# Altium PCB pcb.PcbDoc (part 2 of 2)
Units mil, origin at the board's own origin, x right, y up, seen from the top; angles counter-clockwise.
Board outline 3184 x 2328 mil, 2 copper layers (Top Layer, Bottom Layer); 76 components, 127 nets, 396 pads, 292 vias.
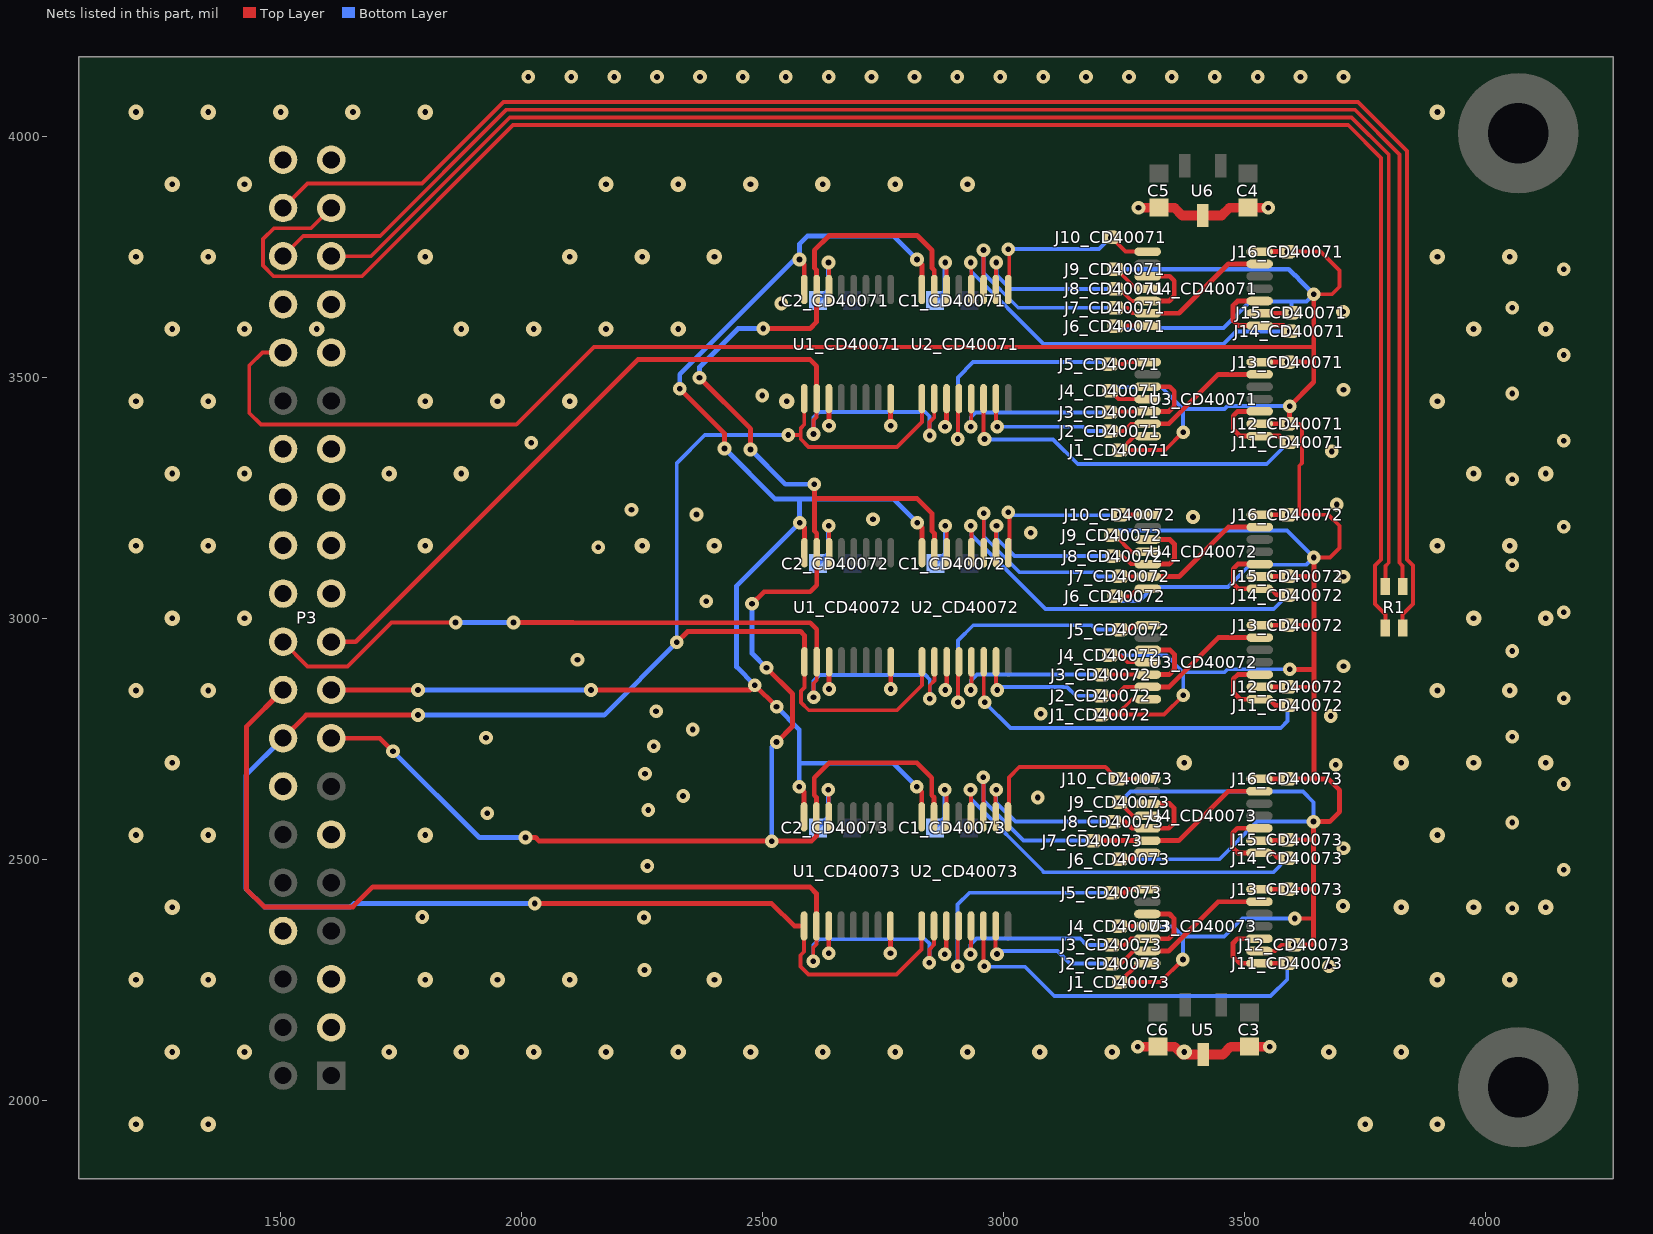
[diagram p2: the nets of this part, all layers, seen from the top]

## Via types
v1: diameter 28.35, hole 11.81, Top Layer to Bottom Layer, tented both sides, 177 vias
v2: diameter 32, hole 11.81, Top Layer to Bottom Layer, tented both sides, 115 vias

## Nets (pads, with @x,y where several pads share a name; then routed paths per layer and width w, separated by ;. In a path a pad name is that pad's centre, name@x,y a point inside that pad or via, vN(x,y) a via of type N, cw(c..) or ccw(c..) an arc to the next point about the centre after c; other vN are vias at no path point) (continued)
"CURRENT RTN": C1_CD40071.2 C1_CD40072.2 C1_CD40073.2 C2_CD40071.2 C2_CD40072.2 C2_CD40073.2 C3.2 C4.2 C5.2 C6.2 P3.3 P3.8 P3.11 P3.14 P3.28 P3.31 P3.33 P3.34 P3.39 P3.40 U1_CD40071.3 U1_CD40071.8 U1_CD40071.14 U1_CD40072.3 U1_CD40072.8 U1_CD40072.14 U1_CD40073.3 U1_CD40073.8 U1_CD40073.14 U2_CD40071.3 U2_CD40071.14 U2_CD40072.3 U2_CD40072.14 U2_CD40073.3 U2_CD40073.14 U5.3 U6.3 | length 1951.4
  Top Layer w8: U1_CD40073.14@2637.17,2587.87 v1@2637.17,2644.06 ; U1_CD40071.14@2637.61,3681.87 v1@2637.61,3738.06 ; U1_CD40072.14@2637.93,3135.87 v1@2637.93,3192.06 ; U2_CD40073.14@2881.17,2587.87 v1@2881.17,2644.06 ; U2_CD40071.14@2881.61,3681.87 v1@2881.61,3738.06 ; U2_CD40072.14@2881.93,3135.87 v1@2881.93,3192.06
  Top Layer w10: v1(2637.17,2305.13) U1_CD40073.3@2637.17,2361.5 ; v1(2637.61,3399.13) U1_CD40071.3@2637.61,3455.5 ; v1(2637.93,2853.13) U1_CD40072.3@2637.93,2909.5 ; v1(2765.13,2305.13) U1_CD40073.8@2765.13,2361.5 ; v1(2765.57,3399.13) U1_CD40071.8@2765.57,3455.5 ; v1(2765.88,2853.13) U1_CD40072.8@2765.88,2909.5 ; v1(2878,2303) 2881.17,2306.17 U2_CD40073.3@2881.17,2361.5 ; v1(2878.44,3397) 2881.61,3400.17 U2_CD40071.3@2881.61,3455.5 ; v1(2878.76,2851) 2881.93,2854.17 U2_CD40072.3@2881.93,2909.5
  Top Layer w20: v1(3278,2111.01) C6.2@3320,2111.01 3354.99,2111.01 3371.13,2094.87 U5.3@3414,2094.87 3454.87,2094.87 3471.01,2111.01 C3.2@3510,2111.01 v1(3552,2111.01) ; v1(3280,3851.57) C5.2@3322,3851.57 3354.43,3851.57 3370.57,3835.43 U6.3@3413,3835.43 3452.43,3835.43 3468.57,3851.57 C4.2@3507,3851.57 v1(3549,3851.57)
  Bottom Layer w10: C2_CD40073.2@2614.57,2565 2636.17,2586.61 v1(2636.17,2644.06) ; C2_CD40071.2@2615.01,3659 2636.61,3680.61 v1(2636.61,3738.06) ; C2_CD40072.2@2615.32,3113 2636.93,3134.61 v1(2636.93,3192.06) ; C1_CD40073.2@2857.57,2565 2878.17,2585.61 v1(2878.17,2644.06) ; C1_CD40071.2@2858.01,3659 2878.61,3679.61 v1(2878.61,3738.06) ; C1_CD40072.2@2858.32,3113 2878.93,3133.61 v1(2878.93,3192.06)
  other v1: 2255,2270 3675,2278 2254,2379 1794,2380 4055,2398 3704,2403 4162,2478 2261,2486 3705,2523 4055,2576 1929,2595 2263,2602 3071,2628 2335,2631 4162,2656 2256,2677 3689,2696 2274,2734 1926,2752 4055,2754 2355,2769 3679,2797 3077,2802 2279,2807 4162,2834 3705,2900 2116,2914 4055,2932 4162,3012 2383,3035 3705,3086 4055,3110 2159,3147 3056,3177 4162,3190 2729,3205 3393,3210 2363,3215 2228,3225 3691,3236 4055,3288 3681,3346 2020,3364 4162,3368 2499,3462 4055,3466 3705,3474 4162,3546 3704,3636 4055,3644 2539,3653 4162,3724 2014,4123 2103,4123 2192,4123 2281,4123 2370,4123 2459,4123 2548,4123 2637,4123 2726,4123 2815,4123 2904,4123 2993,4123 3082,4123 3171,4123 3260,4123 3349,4123 3438,4123 3527,4123 3616,4123 3705,4123
  other v2: 1200,1950 1200,1950 1350,1950 3750,1950 3900,1950 1275,2100 1275,2100 1425,2100 1725,2100 1875,2100 2025,2100 2175,2100 2325,2100 2475,2100 2625,2100 2775,2100 2925,2100 3075,2100 3225,2100 3375,2100 3675,2100 3825,2100 1200,2250 1200,2250 1350,2250 1800,2250 1950,2250 2100,2250 2400,2250 3900,2250 4050,2250 1275,2400 1275,2400 3825,2400 3975,2400 4125,2400 1200,2550 1200,2550 1350,2550 1800,2550 3900,2550 1275,2700 1275,2700 3375,2700 3825,2700 3975,2700 4125,2700 1200,2850 1200,2850 1350,2850 3900,2850 4050,2850 1275,3000 1275,3000 1425,3000 3975,3000 4125,3000 1200,3150 1200,3150 1350,3150 1800,3150 2250,3150 2400,3150 3900,3150 4050,3150 1275,3300 1275,3300 1425,3300 1725,3300 1875,3300 3975,3300 4125,3300 1200,3450 1200,3450 1350,3450 1800,3450 1950,3450 2100,3450 2550,3450 3900,3450 1275,3600 1275,3600 1425,3600 1575,3600 1875,3600 2025,3600 2175,3600 2325,3600 3975,3600 4125,3600 1200,3750 1200,3750 1350,3750 1800,3750 2100,3750 2250,3750 2400,3750 3900,3750 4050,3750 1275,3900 1275,3900 1425,3900 2175,3900 2325,3900 2475,3900 2625,3900 2775,3900 2925,3900 1200,4050 1200,4050 1350,4050 1500,4050 1650,4050 1800,4050 3900,4050
CURRENT_IN_CD40071: J1_CD40071.2 J1_CD40072.2 J1_CD40073.2 J4_CD40071.2 J4_CD40072.2 J4_CD40073.2 J6_CD40071.2 J6_CD40072.2 J6_CD40073.2 J9_CD40071.2 J9_CD40072.2 J9_CD40073.2 J12_CD40071.2 J12_CD40072.2 J12_CD40073.2 J13_CD40071.2 J13_CD40072.2 J13_CD40073.2 J15_CD40071.2 J15_CD40072.2 J15_CD40073.2 J16_CD40071.2 J16_CD40072.2 J16_CD40073.2 P3.32 | length 9245.7
  Top Layer w8: P3.32@1505,3551.03 1462.03,3551.03 1435,3524 1435,3426 1459,3402 1989,3402 2150,3563 3643.44,3563 ; J1_CD40072.2@3201,2800 3333,2800 3372.76,2839.76 v1(3372.76,2840) ; J1_CD40073.2@3240.56,2244.91 3324.91,2244.91 v1(3372,2292) ; J1_CD40071.2@3241,3348.91 3335.35,3348.91 v1(3372.44,3386) ; J12_CD40071.2@3589,3403.5 3613.5,3403.5 3619,3398 3619,3322 3613.31,3316.31 3613.31,3214.46 ; J12_CD40072.2@3589.31,2857.5 3642.26,2857.5 3643.76,2859 ; J16_CD40072.2@3589.31,3214.46 3613.31,3214.46 ; v1(3604,2377) 3642,2377 3643,2378 ; 3606,3760.46 3657.54,3760.46 3696.61,3721.39 3696.61,3687.61 3681,3672 v1(3643.44,3672) ; v1(3643.76,3126) 3676.94,3126 3696.93,3145.99 3696.93,3191.83 3674.3,3214.46 3613.31,3214.46
  Top Layer w10: J13_CD40073.2@3588.56,2437.46 3641.46,2437.46 ; J15_CD40073.2@3588.56,2540.5 3642.5,2540.5 ; J16_CD40073.2@3588.56,2666.46 3645,2666.46 ; J12_CD40071.2@3589,3403.5 3593.44,3407.95 v1(3593.44,3440) 3643.44,3490 3643.44,3563 v1(3643.44,3672) ; J13_CD40072.2@3589.31,2985.46 3642.21,2985.46 ; J15_CD40072.2@3589.31,3086.5 3643.26,3086.5 ; v1@3593.76,2893.31 3643.76,2893.31 3643.76,2859 3643.76,2667.7 3645,2666.46 ; J12_CD40073.2@3602.56,2322.5 3640.5,2322.5 3643,2325 3643,2378 v1(3643,2578) 3676.43,2578 3697.17,2598.74 3697.17,2642.83 3673.54,2666.46 3645,2666.46 ; 3607,3531.46 3641.9,3531.46 ; 3643.76,2894 v1(3643.76,3126)
  Bottom Layer w8: J4_CD40072.2@3220,2923 3337.58,2923 3372.76,2887.83 ; J6_CD40071.2@3232,3602 3456.44,3602 3511.44,3657 3597,3657 ; J4_CD40071.2@3234,3479 3321.27,3479 ; J9_CD40072.2@3235,3182 3587.76,3182 v1(3643.76,3126) 3628.76,3111 3511.76,3111 3465.71,3064.96 3310.76,3064.96 3280.8,3035 3245,3035 J6_CD40072.2@3236,3044 ; J4_CD40073.2@3240.56,2360.68 3351.14,2360.69 3372,2339.83 ; J6_CD40073.2@3240.56,2499.91 3447.91,2499.91 3526,2578 v1(3643,2578) 3643,2618 3620.83,2640.17 3263.05,2640.17 J9_CD40073.2@3240.56,2617.68 ; 3313,3479 3327.27,3479 3372.44,3433.83 ; v1(3372,2292) 3372,2339.83 ; v1(3372.44,3386) 3372.44,3433.83 ; v1(3372.76,2840) 3372.76,2887.83 ; v1(3593.44,3440) 3464.44,3440 3458.27,3433.83 3372.44,3433.83 ; v1(3593.76,2894) 3464.76,2894 3458.58,2887.83 3372.76,2887.83 ; J15_CD40071.2@3597,3634 3597,3657 ; v1@3609,2377 v1(3604,2377) 3495,2377 3457.83,2339.83 3372,2339.83 ; v1(3643.44,3672) 3628.44,3657 3597,3657
  Bottom Layer w10: J9_CD40071.2@3232,3724 3591.44,3724 3603.27,3712.17 3603.7,3712.17 3619.61,3696.26 3619.61,3695.83 v1(3643.44,3672)
FORCE+: P3.35 R1.4 | length 3243.8
  Top Layer w8: P3.35@1605,3751.03 1687.4,3751.03 1975.37,4039 3721.75,4039 3799,3961.75 3799,3115 3792.28,3108.28 R1.4@3792.28,3065.99
FORCE-: P3.37 R1.1 | length 3699.8
  Top Layer w8: P3.37@1605,3851.03 1562.97,3809 1486,3809 1463.47,3786.47 1463.47,3731.53 1485.5,3709.5 1668.5,3709.5 1982,4023 3715.12,4023 3783,3955.12 3783,3121.63 3770.44,3109.07 3770.44,3029.56 3792.28,3007.72 R1.1@3792.28,2979.38
GATE_0_CD40071: J2_CD40071.3 U3_CD40071.6 U3_CD40071.13 | length 359
  Top Layer w8: J2_CD40071.3@3221,3388 3249,3388 3264.5,3403.5 U3_CD40071.13@3298.86,3403.5
  Top Layer w10: U3_CD40071.13@3299.04,3403.5 3342.95,3403.5 3445.31,3505.87 U3_CD40071.6@3531.32,3505.87
GATE_0_CD40072: J2_CD40072.3 U3_CD40072.6 U3_CD40072.13 | length 379.7
  Top Layer w8: J2_CD40072.3@3202,2839 3232,2839 3250.5,2857.5 U3_CD40072.13@3299.17,2857.5 U3_CD40072.13@3299.35,2857.5
  Top Layer w10: U3_CD40072.13@3299.35,2857.5 3343.26,2857.5 3445.62,2959.87 U3_CD40072.6@3531.64,2959.87
GATE_0_CD40073: J2_CD40073.3 U3_CD40073.6 U3_CD40073.13 | length 360.3
  Top Layer w8: J2_CD40073.3@3223.56,2283.5 3243.5,2283.5 3269.5,2309.5 U3_CD40073.13@3298.42,2309.5
  Top Layer w10: U3_CD40073.13@3298.6,2309.5 3342.5,2309.5 3444.87,2411.87 U3_CD40073.6@3530.88,2411.87
GATE_1_CD40071: J11_CD40071.3 U3_CD40071.1 U3_CD40071.3 | length 200.6
  Top Layer w10: U3_CD40071.3@3531.14,3429.09 3485.41,3429.09 3476.44,3420.13 3476.44,3392.04 3490.57,3377.91 U3_CD40071.1@3531.14,3377.91 3572.09,3377.91 J11_CD40071.3@3581,3369
GATE_1_CD40072: J11_CD40072.3 U3_CD40072.1 U3_CD40072.3 | length 210.3
  Top Layer w10: U3_CD40072.3@3531.46,2883.09 3485.72,2883.09 3476.76,2874.13 3476.76,2846.04 3490.88,2831.91 U3_CD40072.1@3531.46,2831.91 3551.09,2831.91 3564.09,2818.91 J11_CD40072.3@3589.31,2818.91
GATE_1_CD40073: J11_CD40073.3 U3_CD40073.1 U3_CD40073.3 | length 254.8
  Top Layer w10: U3_CD40073.3@3530.7,2335.09 3484.97,2335.09 3476,2326.13 3476,2298.04 3490.13,2283.91 U3_CD40073.1@3530.7,2283.91 ; J11_CD40073.3@3580.56,2283.91 U3_CD40073.1@3530.7,2283.91 ; J11_CD40073.3@3588.56,2283.91 U3_CD40073.1@3530.7,2283.91
GATE_2_CD40071: J3_CD40071.3 U3_CD40071.10 U3_CD40071.12 | length 222.4
  Top Layer w8: J3_CD40071.3@3226,3429.09 U3_CD40071.12@3298.86,3429.09
  Top Layer w10: U3_CD40071.12@3298.86,3429.09 3343.08,3429.09 3354,3440.01 3354,3470.87 3344.59,3480.28 U3_CD40071.10@3298.86,3480.28
GATE_2_CD40072: J3_CD40072.3 U3_CD40072.10 U3_CD40072.12 | length 247.4
  Top Layer w8: J3_CD40072.3@3203,2879 3207,2883 3299.08,2883 U3_CD40072.12@3299.17,2883.09
  Top Layer w10: U3_CD40072.12@3299.17,2883.09 3343.39,2883.09 3354.31,2894.01 3354.31,2924.87 3344.91,2934.28 U3_CD40072.10@3299.17,2934.28
GATE_2_CD40073: J3_CD40073.3 U3_CD40073.10 U3_CD40073.12 | length 229.4
  Top Layer w8: J3_CD40073.3@3224,2322 3251,2322 3264.09,2335.09 U3_CD40073.12@3298.42,2335.09
  Top Layer w10: U3_CD40073.12@3298.42,2335.09 3342.64,2335.09 3353.56,2346.01 3353.56,2376.87 3344.15,2386.28 U3_CD40073.10@3298.42,2386.28
GATE_3_CD40071: J7_CD40071.3 U4_CD40071.6 U4_CD40071.13 | length 346.3
  Top Layer w8: J7_CD40071.3@3232,3644 3257,3644 3268.5,3632.5 U4_CD40071.13@3298.86,3632.5
  Top Layer w10: U4_CD40071.13@3298.86,3632.5 3363.82,3632.5 3466.18,3734.87 U4_CD40071.6@3531.14,3734.87
GATE_3_CD40072: J7_CD40072.3 U4_CD40072.6 U4_CD40072.13 | length 332.7
  Top Layer w8: J7_CD40072.3@3241.13,3086.5 U4_CD40072.13@3299.17,3086.5
  Top Layer w10: U4_CD40072.13@3299.17,3086.5 3364.13,3086.5 3466.5,3188.87 U4_CD40072.6@3531.46,3188.87
GATE_3_CD40073: J7_CD40073.3 U4_CD40073.6 U4_CD40073.13 | length 387.7
  Top Layer w10: J7_CD40073.3@3185.38,2538.5 U4_CD40073.13@3298.42,2538.5 3363.38,2538.5 3465.74,2640.87 U4_CD40073.6@3530.7,2640.87
GATE_4_CD40071: J14_CD40071.3 U4_CD40071.1 U4_CD40071.3 | length 216.4
  Top Layer w10: U4_CD40071.3@3531.14,3658.09 3485.41,3658.09 3476,3648.68 3476,3617.68 3486.77,3606.91 U4_CD40071.1@3531.14,3606.91 3581.09,3606.91 J14_CD40071.3@3593,3595
GATE_4_CD40072: J14_CD40072.3 U4_CD40072.1 U4_CD40072.3 | length 212.9
  Top Layer w10: U4_CD40072.3@3531.46,3112.09 3485.72,3112.09 3476.32,3102.68 3476.32,3071.68 3487.09,3060.91 U4_CD40072.1@3531.46,3060.91 3555.09,3060.91 3568.09,3047.91 J14_CD40072.3@3589.31,3047.91
GATE_4_CD40073: J14_CD40073.3 U4_CD40073.1 U4_CD40073.3 | length 211.6
  Top Layer w10: U4_CD40073.3@3530.7,2564.09 3484.97,2564.09 3475.56,2554.68 3475.56,2523.68 3486.33,2512.91 U4_CD40073.1@3530.7,2512.91 3559.09,2512.91 3569.09,2502.91 J14_CD40073.3@3588.56,2502.91
GATE_5_CD40071: J8_CD40071.3 U4_CD40071.10 U4_CD40071.12 | length 226.8
  Top Layer w8: J8_CD40071.3@3232,3683 3241,3683 3265.91,3658.09 U4_CD40071.12@3298.86,3658.09
  Top Layer w10: U4_CD40071.12@3298.86,3658.09 3343.23,3658.09 3354,3668.87 3354,3699.87 3344.59,3709.28 U4_CD40071.10@3298.86,3709.28
GATE_5_CD40072: J8_CD40072.3 U4_CD40072.10 U4_CD40072.12 | length 228.8
  Top Layer w8: J8_CD40072.3@3227,3129 3247,3129 3263.91,3112.09 U4_CD40072.12@3299.17,3112.09
  Top Layer w10: U4_CD40072.12@3299.17,3112.09 3343.54,3112.09 3354.31,3122.87 3354.31,3153.87 3344.91,3163.28 U4_CD40072.10@3299.17,3163.28
GATE_5_CD40073: J8_CD40073.3 U4_CD40073.10 U4_CD40073.12 | length 225.8
  Top Layer w10: J8_CD40073.3@3228,2578 3252,2578 3265.91,2564.09 U4_CD40073.12@3298.42,2564.09 3342.79,2564.09 3353.56,2574.87 3353.56,2605.87 3344.15,2615.28 U4_CD40073.10@3298.42,2615.28
GND: P3.5
GPIO0: P3.16 U1_CD40071.1 U1_CD40072.1 U1_CD40073.1 U2_CD40071.1 U2_CD40072.1 U2_CD40073.1 | length 4670.3
  Top Layer w8: v1(2553,3380) 2579.27,3380 ; U1_CD40073.1@2585.99,2361.5 2585.99,2307.99 2578.83,2300.83 2578.83,2277.16 2594.99,2261 2778,2261 2829.99,2312.99 U2_CD40073.1@2829.99,2361.5 ; U1_CD40071.1@2586.43,3455.5 2586.43,3401.99 2579.27,3394.83 2579.27,3380 ; U1_CD40072.1@2586.75,2909.5 2586.75,2855.99 2579.58,2848.83 2579.58,2825.16 2595.74,2809 2778.76,2809 2830.75,2860.99 U2_CD40072.1@2830.75,2909.5 ; U2_CD40071.1@2830.43,3455.5 2830.43,3406.99 2778.44,3355 2595.43,3355 2579.27,3371.16 2579.27,3380
  Top Layer w10: P3.16@1505,2751.03 1552.97,2799 v1(1785,2799) ; v1(2027,2408) 2519,2408 2565.5,2361.5 U1_CD40073.1@2585.99,2361.5 ; v1(2322,2950) 2344.37,2972.37 2578.76,2972.37 2586.75,2964.38 U1_CD40072.1@2586.75,2909.5
  Bottom Layer w8: v1(2322,2950) 2322,3322 2380,3380 v1(2553,3380)
  Bottom Layer w10: P3.16@1505,2751.03 1428,2674.03 1428,2439 1466,2401 1645,2401 1652,2408 v1(2027,2408) ; v1(1785,2799) 2171,2799 v1(2322,2950)
GPIO1: P3.15 U1_CD40071.15 U1_CD40072.15 U1_CD40073.15 U2_CD40071.15 U2_CD40072.15 U2_CD40073.15 | length 3983.8
  Top Layer w10: P3.15@1605,2751.03 1705.97,2751.03 v1(1733,2724) ; v1(2008,2545) 2029,2545 2036,2538 2602,2538 2611.58,2547.58 U1_CD40073.15@2611.58,2587.87 2611.58,2628.22 2607,2632.81 2607,2669 2638,2700 2820,2700 2851,2669 2851,2632.81 2855.58,2628.22 U2_CD40073.15@2855.58,2587.87 ; v1(2369,3499) 2475,3393 v1(2475,3350) ; v1(2478,3030) 2503,3055 2598.76,3055 2612.34,3068.58 U1_CD40072.15@2612.34,3135.87 2612.34,3176.22 2607.76,3180.81 2607.76,3277.24 v1(2607,3278) ; v1(2501,3601) 2598.44,3601 2612.02,3614.58 U1_CD40071.15@2612.02,3681.87 2612.02,3722.22 2607.44,3726.81 2607.44,3763 2638.44,3794 2820.44,3794 2851.44,3763 2851.44,3726.81 2856.02,3722.22 U2_CD40071.15@2856.02,3681.87 ; v1(2508,2897) 2562,2843 2562,2776 v1(2529,2743) ; 2607.76,3248 2820.76,3248 2851.76,3217 2851.76,3180.81 2856.34,3176.22 U2_CD40072.15@2856.34,3135.87
  Bottom Layer w10: v1(1733,2724) 1912,2545 v1(2008,2545) ; v1(2369,3499) 2369,3521 2449,3601 v1(2501,3601) ; v1(2475,3350) 2547,3278 v1(2607,3278) ; v1(2478,3030) 2478,2927 v1(2508,2897) ; v1(2519,2537) 2519,2733 v1(2529,2743)
GPIO2: P3.18 U1_CD40073.2 U2_CD40073.2 | length 2212.9
  Top Layer w8: v1(2605,2288) 2605,2317 2611.58,2323.58 U1_CD40073.2@2611.58,2361.5 ; v1(2846,2285) 2846,2312.83 2855.58,2322.42 U2_CD40073.2@2855.58,2361.5
  Top Layer w10: P3.18@1505,2851.03 1429,2775.03 1429,2438 1466,2401 1650,2401 1691.37,2442.37 2598,2442.37 2611.58,2428.79 U1_CD40073.2@2611.58,2361.5
  Bottom Layer w8: v1(2605,2288) 2605,2322 2617,2334 2837,2334 2846,2325 v1(2846,2285)
GPIO3: P3.17 U1_CD40071.16 U1_CD40072.16 U1_CD40073.16 U2_CD40071.16 U2_CD40072.16 U2_CD40073.16 | length 3603
  Top Layer w10: P3.17@1605,2851.03 v1(1785,2851.03) ; v1(2144,2851.03) 2474.03,2851.03 v1(2484,2861) v1(2529,2816) ; v1(2328,3476) 2421,3383 v1@2421,3355 ; v1(2576,2650) 2585.99,2640.01 U1_CD40073.16@2585.99,2587.87 ; v1(2576.44,3744) 2586.43,3734.01 U1_CD40071.16@2586.43,3681.87 ; v1(2576.76,3198) 2586.75,3188.01 U1_CD40072.16@2586.75,3135.87 ; v1(2820,2650) 2829.99,2640.01 U2_CD40073.16@2829.99,2587.87 ; v1(2820.44,3744) 2830.43,3734.01 U2_CD40071.16@2830.43,3681.87 ; v1(2820.76,3198) 2830.75,3188.01 U2_CD40072.16@2830.75,3135.87
  Bottom Layer w10: v1(1785,2851.03) v1(2144,2851.03) ; v1(2328,3476) 2328,3506 2566,3744 v1(2576.44,3744) 2576.44,3776 2593.44,3793 2771.44,3793 v1(2820.44,3744) ; v1(2421,3352) 2526,3247 2578,3247 ; v1(2484,2861) 2446,2899 2446,3067.24 v1(2576.76,3198) 2576.76,3245.76 2578,3247 ; v1(2529,2816) 2576,2769 v1(2576,2650) 2576,2699 2771,2699 v1(2820,2650) ; v1(2820.76,3198) 2771.76,3247 2578,3247
GPIO4: P3.20 U1_CD40072.2 U2_CD40072.2 | length 1721
  Top Layer w8: P3.20@1505,2951.03 1556.03,2900 1639,2900 1730,2991 v1(1863,2991) ; v1(2605.76,2836) 2605.76,2865 2612.34,2871.58 U1_CD40072.2@2612.34,2909.5 ; v1(2846.76,2833) 2846.76,2860.83 2856.34,2870.42 U2_CD40072.2@2856.34,2909.5
  Top Layer w10: v1(1983,2991) 2107,2991 2106.37,2990.37 2598.76,2990.37 2612.34,2976.79 U1_CD40072.2@2612.34,2909.5
  Bottom Layer w8: v1(2605.76,2836) 2605.76,2870 2617.76,2882 2837.76,2882 2846.76,2873 v1(2846.76,2833)
  Bottom Layer w10: v1(1863,2991) v1(1983,2991)
GPIO5: P3.19 U1_CD40071.2 U2_CD40071.2 | length 1802.8
  Top Layer w8: v1(2605.44,3382) 2605.44,3411 2612.02,3417.58 U1_CD40071.2@2612.02,3455.5 ; v1(2846.44,3379) 2846.44,3406.83 2856.02,3416.42 U2_CD40071.2@2856.02,3455.5
  Top Layer w10: P3.19@1605,2951.03 1656.03,2951.03 2241.37,3536.37 2598.44,3536.37 2612.02,3522.79 U1_CD40071.2@2612.02,3455.5
  Bottom Layer w8: v1(2605.44,3382) 2605.44,3416 2617.44,3428 2837.44,3428 2846.44,3419 v1(2846.44,3379)
GPIO6: P3.21
GPIO7: P3.22
GPIO8: P3.23
GPIO9: P3.24
GPIO10: P3.25
GPIO11: P3.26
GPIO12: P3.27
NetJ1_CD40071_3: J1_CD40071.3 U3_CD40071.14 | length 69.3
  Top Layer w8: J1_CD40071.3@3241.96,3347.96 3271.91,3377.91 U3_CD40071.14@3298.86,3377.91
NetJ1_CD40072_3: J1_CD40072.3 U3_CD40072.14 | length 111.4
  Top Layer w8: J1_CD40072.3@3201,2800 3235,2800 3266.91,2831.91 U3_CD40072.14@3299.17,2831.91
NetJ1_CD40073_3: J1_CD40073.3 U3_CD40073.14 | length 74
  Top Layer w8: J1_CD40073.3@3240.56,2244.91 3279.56,2283.91 U3_CD40073.14@3298.42,2283.91
NetJ4_CD40071_3: J4_CD40071.3 U3_CD40071.11 | length 85
  Top Layer w8: J4_CD40071.3@3221,3472 3238.32,3454.68 U3_CD40071.11@3298.86,3454.68
NetJ4_CD40072_3: J4_CD40072.3 U3_CD40072.11 | length 85.1
  Top Layer w8: J4_CD40072.3@3220,2923 3243,2923 3257.32,2908.68 U3_CD40072.11@3299.17,2908.68
NetJ4_CD40073_3: J4_CD40073.3 U3_CD40073.11 | length 57.9
  Top Layer w10: J4_CD40073.3@3240.56,2360.68 U3_CD40073.11@3298.42,2360.68
NetJ5_CD40071_3: J5_CD40071.3 U3_CD40071.8 | length 80.7
  Top Layer w8: J5_CD40071.3@3220,3527 3248,3527 3252.46,3531.46 U3_CD40071.8@3298.86,3531.46
NetJ5_CD40072_3: J5_CD40072.3 U3_CD40072.8 | length 61.6
  Top Layer w10: J5_CD40072.3@3241.32,2976.46 3259.46,2976.46 3268.46,2985.46 U3_CD40072.8@3299.17,2985.46
NetJ5_CD40073_3: J5_CD40073.3 U3_CD40073.8 | length 69.5
  Top Layer w10: J5_CD40073.3@3232,2430 3250,2430 3257.46,2437.46 U3_CD40073.8@3298.42,2437.46
NetJ6_CD40071_3: J6_CD40071.3 U4_CD40071.14 | length 66.9
  Top Layer w8: J6_CD40071.3@3232,3606.91 U4_CD40071.14@3298.86,3606.91
NetJ6_CD40072_3: J6_CD40072.3 U4_CD40072.14 | length 73.8
  Top Layer w8: J6_CD40072.3@3232,3045 3262,3045 3277.91,3060.91 U4_CD40072.14@3299.17,3060.91
NetJ6_CD40073_3: J6_CD40073.3 U4_CD40073.14 | length 63.2
  Top Layer w10: J6_CD40073.3@3240.56,2499.91 3265.91,2499.91 3278.91,2512.91 U4_CD40073.14@3298.42,2512.91
NetJ9_CD40071_3: J9_CD40071.3 U4_CD40071.11 | length 83
  Top Layer w8: J9_CD40071.3@3232.93,3724.93 3274.18,3683.68 U4_CD40071.11@3298.86,3683.68
NetJ9_CD40072_3: J9_CD40072.3 U4_CD40072.11 | length 82.4
  Top Layer w8: J9_CD40072.3@3231,3172 3265.32,3137.68 U4_CD40072.11@3299.17,3137.68
NetJ9_CD40073_3: J9_CD40073.3 U4_CD40073.11 | length 69.5
  Top Layer w8: J9_CD40073.3@3240.56,2617.68 3268.56,2589.68 U4_CD40073.11@3298.42,2589.68
NetJ10_CD40071_3: J10_CD40071.3 U4_CD40071.8 | length 88.8
  Top Layer w8: J10_CD40071.3@3222.5,3790.5 3252.54,3760.46 U4_CD40071.8@3298.86,3760.46
NetJ10_CD40072_3: J10_CD40072.3 U4_CD40072.8 | length 107.7
  Top Layer w10: J10_CD40072.3@3241.32,3214.46 U4_CD40072.8@3299.17,3214.46 J10_CD40072.3@3249.32,3214.46
NetJ10_CD40073_3: J10_CD40073.3 U4_CD40073.8 | length 62.4
  Top Layer w8: J10_CD40073.3@3236,2666.46 U4_CD40073.8@3298.42,2666.46
NetJ12_CD40071_3: J12_CD40071.3 U3_CD40071.2 | length 57.9
  Top Layer w10: U3_CD40071.2@3531.14,3403.5 J12_CD40071.3@3589,3403.5
NetJ12_CD40072_3: J12_CD40072.3 U3_CD40072.2 | length 107.7
  Top Layer w10: J12_CD40072.3@3581.32,2857.5 U3_CD40072.2@3531.46,2857.5 J12_CD40072.3@3589.31,2857.5
NetJ12_CD40073_3: J12_CD40073.3 U3_CD40073.2 | length 77.2
  Top Layer w8: U3_CD40073.2@3530.7,2309.5 3563.5,2309.5 3576.5,2322.5 J12_CD40073.3@3602.56,2322.5
NetJ13_CD40071_3: J13_CD40071.3 U3_CD40071.7 | length 107.7
  Top Layer w10: J13_CD40071.3@3581,3531.46 U3_CD40071.7@3531.14,3531.46 J13_CD40071.3@3589,3531.46
NetJ13_CD40072_3: J13_CD40072.3 U3_CD40072.7 | length 107.7
  Top Layer w10: J13_CD40072.3@3581.32,2985.46 U3_CD40072.7@3531.46,2985.46 J13_CD40072.3@3589.31,2985.46
NetJ13_CD40073_3: J13_CD40073.3 U3_CD40073.7 | length 107.7
  Top Layer w10: J13_CD40073.3@3580.56,2437.46 U3_CD40073.7@3530.7,2437.46 J13_CD40073.3@3588.56,2437.46
NetJ15_CD40071_3: J15_CD40071.3 U4_CD40071.2 | length 107.7
  Top Layer w10: J15_CD40071.3@3581,3632.5 U4_CD40071.2@3531.14,3632.5 J15_CD40071.3@3589,3632.5
NetJ15_CD40072_3: J15_CD40072.3 U4_CD40072.2 | length 107.7
  Top Layer w10: J15_CD40072.3@3581.32,3086.5 U4_CD40072.2@3531.46,3086.5 J15_CD40072.3@3589.31,3086.5
NetJ15_CD40073_3: J15_CD40073.3 U4_CD40073.2 | length 107.7
  Top Layer w10: J15_CD40073.3@3580.56,2538.5 U4_CD40073.2@3530.7,2538.5 J15_CD40073.3@3588.56,2538.5
NetJ16_CD40071_3: J16_CD40071.3 U4_CD40071.7 | length 102.7
  Top Layer w10: J16_CD40071.3@3576,3760.46 U4_CD40071.7@3531.14,3760.46 J16_CD40071.3@3589,3760.46
NetJ16_CD40072_3: J16_CD40072.3 U4_CD40072.7 | length 115.7
  Top Layer w10: U4_CD40072.7@3531.46,3214.46 J16_CD40072.3@3589.31,3214.46 U4_CD40072.7@3531.46,3214.46
NetJ16_CD40073_3: J16_CD40073.3 U4_CD40073.7 | length 115.7
  Top Layer w10: U4_CD40073.7@3530.7,2666.46 J16_CD40073.3@3588.56,2666.46 U4_CD40073.7@3530.7,2666.46
RTDIN+: P3.36 R1.3 | length 3379.4
  Top Layer w8: P3.36@1505,3751.03 1546.97,3793 1706.75,3793 1968.75,4055 3728.37,4055 3821,3962.37 3821,3115 3827.72,3108.28 R1.3@3827.72,3065.99
RTDIN-: P3.38 R1.2 | length 3469.2
  Top Layer w8: P3.38@1505,3851.03 1555.97,3902 1793.12,3902 1962.12,4071 3735,4071 3837,3969 3837,3121.63 3849.56,3109.07 3849.56,3029.56 3827.72,3007.72 R1.2@3827.72,2979.38
V_DIODE_0-2_CD40071: J5_CD40071.1 U2_CD40071.4 | length 541.8
  Top Layer w8: v1@2905.2,3371.68 U2_CD40071.4@2905.2,3455.5
  Bottom Layer w8: v1(2905,3371.68) 2905,3499.68 2936.77,3531.46 3215.54,3531.46 J5_CD40071.1@3220,3527
V_DIODE_0-2_CD40072: J5_CD40072.1 U2_CD40072.4 | length 564.7
  Top Layer w8: v1@2905.52,2825.68 U2_CD40072.4@2905.52,2909.5
  Bottom Layer w8: v1(2905.32,2825.68) 2905.32,2953.68 2937.09,2985.46 3182.54,2985.46 3191.54,2976.46 J5_CD40072.1@3241.32,2976.46
V_DIODE_0-2_CD40073: J5_CD40073.1 U2_CD40073.4 | length 542.1
  Top Layer w8: v1@2904.76,2277.68 U2_CD40073.4@2904.76,2361.5
  Bottom Layer w8: v1(2904.56,2277.68) 2904.56,2405.68 2929.33,2430.46 J5_CD40073.1@3224.56,2430.46
V_DIODE_3-5_CD40071: J10_CD40071.1 U2_CD40071.9 | length 305
  Top Layer w8: U2_CD40071.9@3011.57,3681.87 v1@3011.57,3763.68
  Bottom Layer w8: v1(3009.57,3765.68) 3197.68,3765.68 J10_CD40071.1@3222.5,3790.5
V_DIODE_3-5_CD40072: J10_CD40072.1 U2_CD40072.9 | length 315.7
  Top Layer w8: U2_CD40072.9@3011.88,3135.87 v1@3011.88,3217.68
  Bottom Layer w8: v1(3009.88,3219.68) 3015.88,3213.68 J10_CD40072.1@3241.32,3213.68
V_DIODE_3-5_CD40073: J10_CD40073.1 U2_CD40073.9 | length 308.9
  Top Layer w8: U2_CD40073.9@3011.13,2587.87 3011.13,2669.68 3032.44,2691 3211,2691 J10_CD40073.1@3224,2678
V_MOS_0_CD40071: J2_CD40071.1 U2_CD40071.7 | length 296.8
  Top Layer w8: v1@2983.98,3396.89 U2_CD40071.7@2983.98,3455.5
  Bottom Layer w8: v1(2986.58,3397.1) 3164.9,3397.1 3174,3388 J2_CD40071.1@3221,3388
V_MOS_0_CD40072: J2_CD40072.1 U2_CD40072.7 | length 284
  Top Layer w8: v1@2984.29,2850.89 U2_CD40072.7@2984.29,2909.5
  Bottom Layer w8: v1(2986.9,2851.1) 2993.3,2857.5 3131.5,2857.5 3150,2839 J2_CD40072.1@3202,2839
V_MOS_0_CD40073: J2_CD40073.1 U2_CD40073.7 | length 309.4
  Top Layer w8: v1@2983.54,2302.89 U2_CD40073.7@2983.54,2361.5
  Bottom Layer w8: v1(2986.14,2303.1) 2992.54,2309.5 3111.5,2309.5 3137.5,2283.5 J2_CD40073.1@3223.56,2283.5
V_MOS_1_CD40071: J11_CD40071.1 U2_CD40071.6 | length 754.5
  Top Layer w8: v1@2958.39,3371.68 U2_CD40071.6@2958.39,3455.5
  Bottom Layer w8: v1(2960.39,3371.68) 2961.14,3370.93 3102.76,3370.93 3153.68,3320 3546,3320 J11_CD40071.1@3591,3365
V_MOS_1_CD40072: J11_CD40072.1 U2_CD40072.6 | length 773.2
  Top Layer w8: v1@2958.7,2825.68 U2_CD40072.6@2958.7,2909.5
  Bottom Layer w8: v1(2960.7,2825.68) 3014.39,2772 3575,2772 3589.31,2786.31 J11_CD40072.1@3589.31,2818.91
V_MOS_1_CD40073: J11_CD40073.1 U2_CD40073.6 | length 785.7
  Top Layer w8: v1@2957.94,2277.68 U2_CD40073.6@2957.94,2361.5
  Bottom Layer w8: v1(2959.94,2277.68) 2960.7,2276.93 3044.07,2276.93 3105.12,2215.88 3553.88,2215.88 3588.56,2250.56 J11_CD40073.1@3588.56,2283.91
V_MOS_2_CD40071: J3_CD40071.1 U2_CD40071.5 | length 370.5
  Top Layer w8: v1@2932.8,3396.89 U2_CD40071.5@2932.8,3455.5
  Bottom Layer w8: v1(2931.8,3397.1) 2931.8,3416.48 2942.32,3427 J3_CD40071.1@3220,3427
V_MOS_2_CD40072: J3_CD40072.1 U2_CD40072.5 | length 354.1
  Top Layer w8: v1@2933.11,2850.89 U2_CD40072.5@2933.11,2909.5
  Bottom Layer w8: v1(2932.11,2851.1) 2932.11,2870.48 2944.72,2883.09 J3_CD40072.1@3203,2883.09
V_MOS_2_CD40073: J3_CD40073.1 U2_CD40073.5 | length 381.3
  Top Layer w8: v1@2932.35,2302.89 U2_CD40073.5@2932.35,2361.5
  Bottom Layer w8: v1(2931.35,2303.1) 2931.35,2322.48 2943.97,2335.09 3158.91,2335.09 3172,2322 J3_CD40073.1@3224,2322
V_MOS_3_CD40071: J7_CD40071.1 U2_CD40071.11 | length 433
  Top Layer w8: U2_CD40071.11@2958.39,3681.87 v1(2958.39,3763.68)
  Bottom Layer w8: v1(2958.39,3763.68) 2958.39,3715.93 3030.31,3644 J7_CD40071.1@3232,3644
V_MOS_3_CD40072: J7_CD40072.1 U2_CD40072.11 | length 446.6
  Top Layer w8: U2_CD40072.11@2958.7,3135.87 v1(2958.7,3217.68)
  Bottom Layer w8: v1(2958.7,3217.68) 2958.7,3169.93 3033.19,3095.44 3186.32,3095.44 3195.25,3086.5 J7_CD40072.1@3241.13,3086.5
V_MOS_3_CD40073: J7_CD40073.1 U2_CD40073.11 | length 391.6
  Top Layer w8: U2_CD40073.11@2957.94,2587.87 v1(2957.94,2669.68)
  Bottom Layer w8: v1(2957.94,2669.68) 2957.94,2621.93 3041.37,2538.5 J7_CD40073.1@3185.38,2538.5
V_MOS_4_CD40071: J14_CD40071.1 U2_CD40071.12 | length 809.4
  Top Layer w8: U2_CD40071.12@2932.8,3681.87 v1@2932.8,3738.06
  Bottom Layer w8: v1@2932.8,3738.06 2932.8,3718.89 3082.68,3569 3456.32,3569 3482.32,3595 J14_CD40071.1@3594,3595
  other v1: 2931.8,3738.06
V_MOS_4_CD40072: J14_CD40072.1 U2_CD40072.12 | length 807.3
  Top Layer w8: U2_CD40072.12@2933.11,3135.87 v1@2933.11,3192.06
  Bottom Layer w8: v1@2933.11,3192.06 2933.11,3172.89 3087,3019 3560.4,3019 J14_CD40072.1@3589.31,3047.91
  other v1: 2932.11,3192.06
V_MOS_4_CD40073: J14_CD40073.1 U2_CD40073.12 | length 805.6
  Top Layer w8: U2_CD40073.12@2932.35,2587.87 v1@2932.35,2644.06
  Bottom Layer w8: v1@2932.35,2644.06 2932.35,2624.89 3082.24,2475 ; 3082.24,2473 3559.65,2473 J14_CD40073.1@3588.56,2501.91
  other v1: 2931.35,2644.06
V_MOS_5_CD40071: J8_CD40071.1 U2_CD40071.10 | length 341.3
  Top Layer w8: U2_CD40071.10@2983.98,3681.87 v1@2983.98,3738.06
  Bottom Layer w8: v1(2984.98,3738.06) 2984.98,3711.96 3013.94,3683 J8_CD40071.1@3232,3683
V_MOS_5_CD40072: J8_CD40072.1 U2_CD40072.10 | length 339.3
  Top Layer w8: U2_CD40072.10@2984.29,3135.87 v1@2984.29,3192.06
  Bottom Layer w8: v1(2985.29,3192.06) 2985.29,3165.96 3022.25,3129 J8_CD40072.1@3227,3129
V_MOS_5_CD40073: J8_CD40073.1 U2_CD40073.10 | length 342.3
  Top Layer w8: U2_CD40073.10@2983.54,2587.87 v1@2983.54,2644.06
  Bottom Layer w8: v1(2984.54,2644.06) 2984.54,2617.96 3024.5,2578 J8_CD40073.1@3228,2578
pads on no net: MNT1.1 MNT2.1 U3_CD40071.4 U3_CD40071.5 U3_CD40071.9 U3_CD40072.4 U3_CD40072.5 U3_CD40072.9 U3_CD40073.4 U3_CD40073.5 U3_CD40073.9 U4_CD40071.4 U4_CD40071.5 U4_CD40071.9 U4_CD40072.4 U4_CD40072.5 U4_CD40072.9 U4_CD40073.4 U4_CD40073.5 U4_CD40073.9

## Polygon pours and split planes (outlines as drawn)
"CURRENT RTN" on Bottom Layer "CURRENT_RTN_L02_P000" (solid, remove dead copper, pour order 0): 1081,4165 1081,1837 4265,1837 4265,4165
"CURRENT RTN" on Top Layer "CURRENT_RTN_L01_P002" (solid, remove dead copper, pour order 2): 1081,4165 1081,1837 4265,1837 4265,4165

## Silkscreen, mask and mechanical layers (free items; w line width, h text height)
Mechanical 13:
  lines w8: 2142.23,1837 1081,1837 ; 3203.77,4165 4265,4165 4265,3103.77 ; 3207,4165 1081,4165 1081,1837 ; 4265,3105 4265,1837 1081,1837

## Text inside footprints (layer, text, board x,y; h text height)
P3: Top Overlay "2" at 1525,1761.03 h50 r90; Top Overlay "40" at 1525,4201.03 h50 r90; Top Overlay "1" at 1625,1761.03 h50 r90; Top Overlay "39" at 1625,4201.03 h50 r90